# EAGLE board board (EAGLE 5.06)
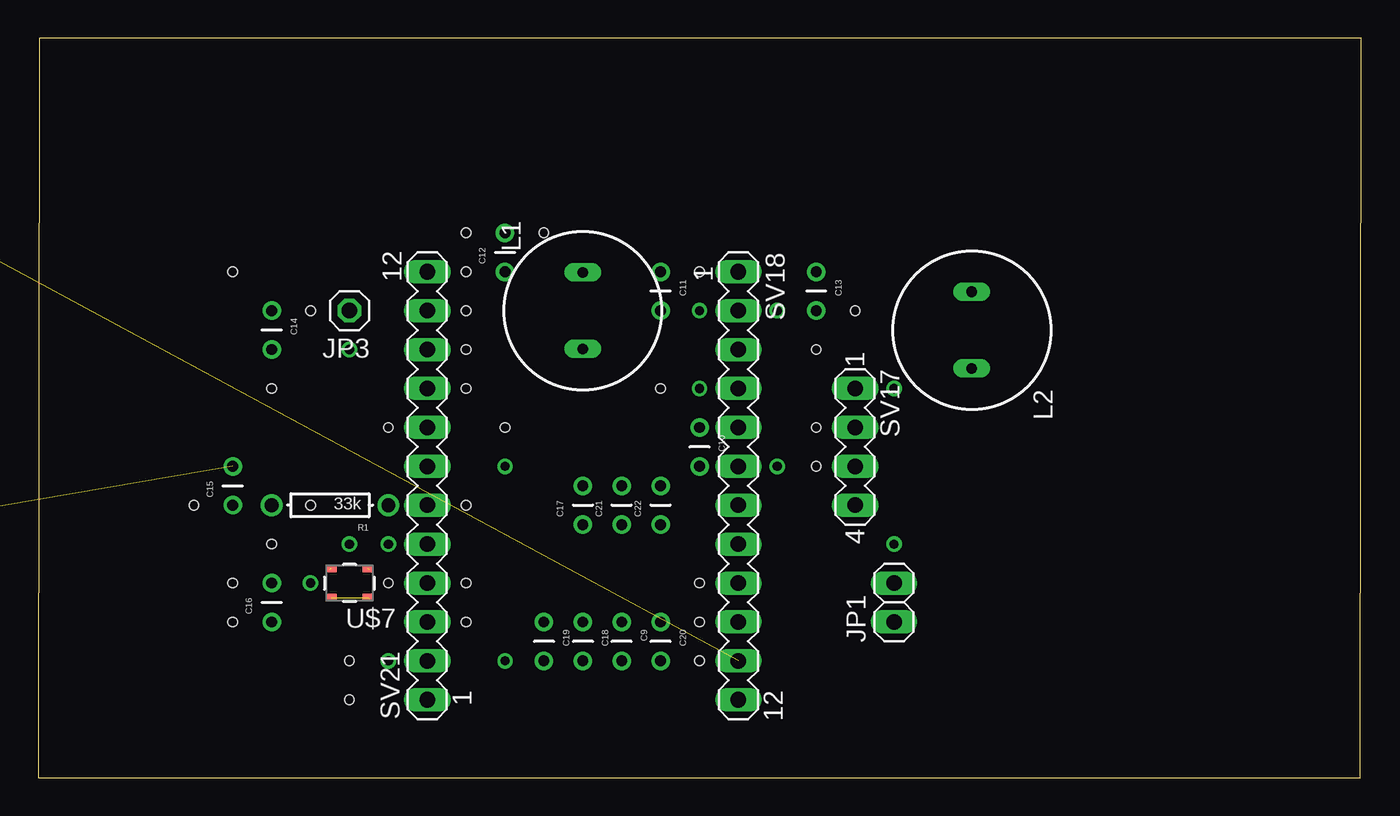
[diagram p0: board, top side]
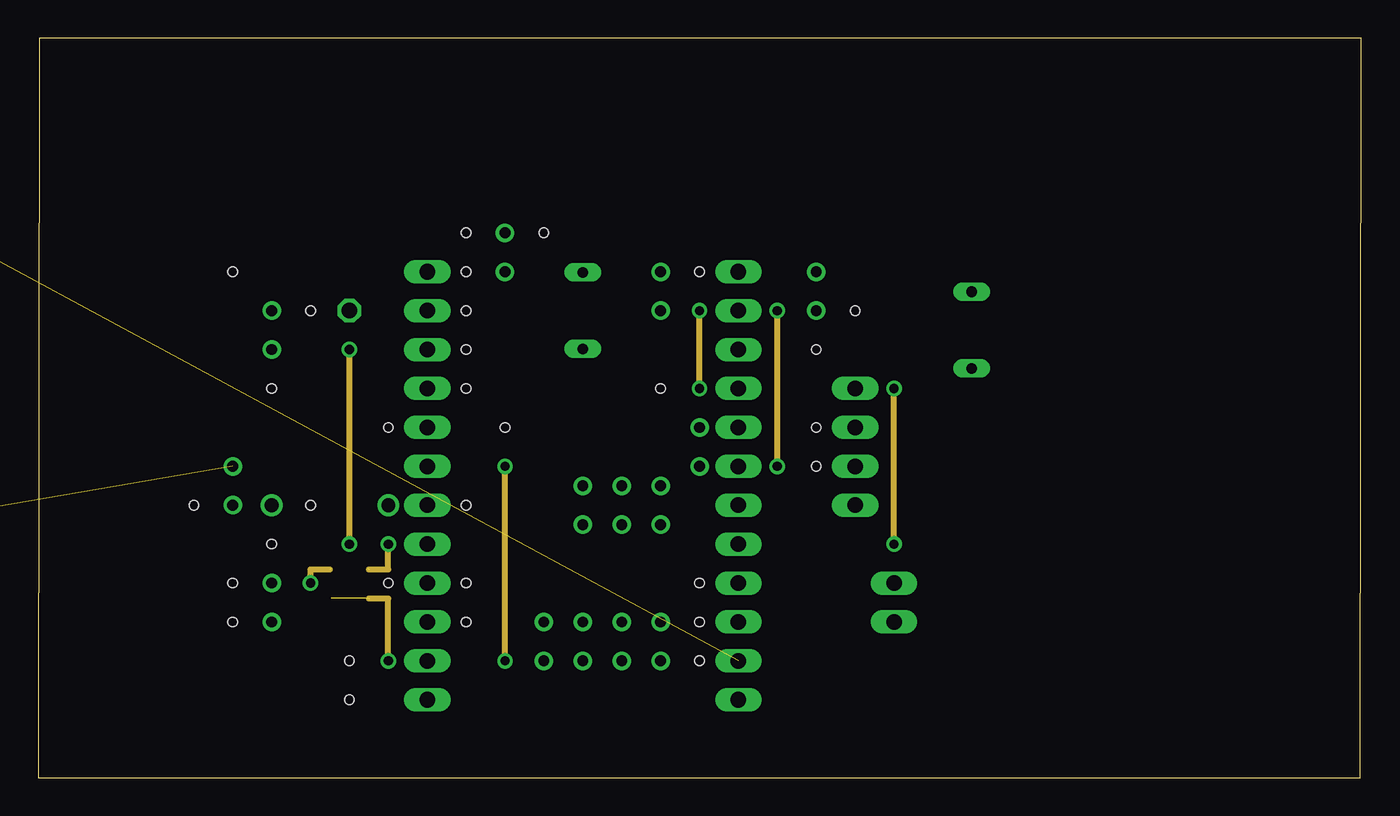
[diagram p1: board, inner layer Route15]
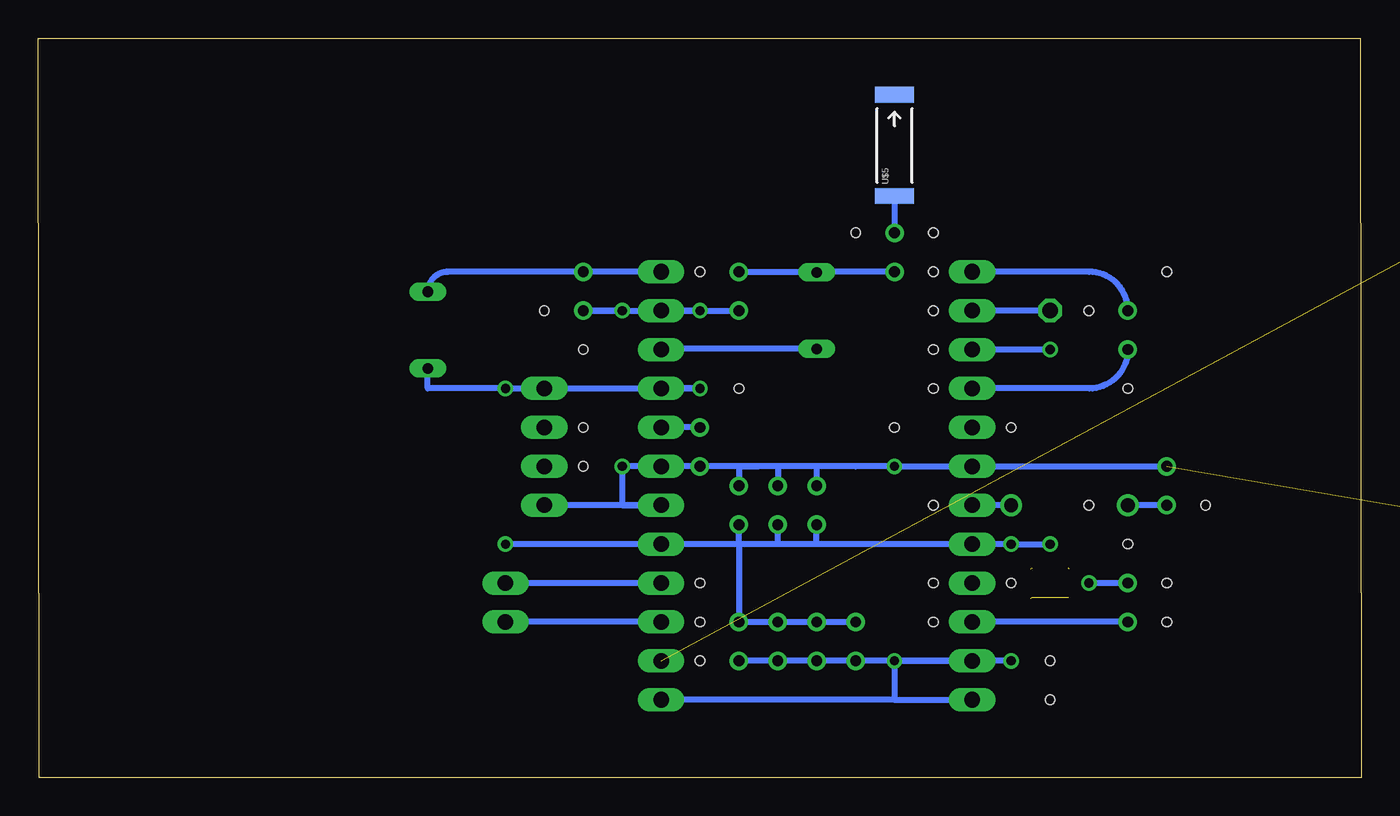
[diagram p2: board, bottom side, seen from below]

Size 86.39 x 48.26 mm. Coordinates in mm from the lower left corner, seen from the top.
Outline: 0,0 86.34,0 86.39,48.26 0.05,48.26 0,0
Copper layers (1*16): Top 0.035mm / dielectric 1.5mm / Bottom 0.035mm
Design rules "default": minimum track width 10mil, minimum drill 24mil, track to track 8mil, track to pad 8mil, pad to pad 8mil, via to via 8mil, smd to smd 8mil, copper to edge 40mil, drill to drill 8mil, minimum pad ring 10mil, minimum via ring 8mil, stop-mask expansion 4mil, vias tented up to drill 0mil, thermal gap 10mil
Holes 0.6 mm at 17.78,30.48 15.24,25.4 27.94,30.48 50.8,22.86 12.7,10.16 12.7,12.7 22.86,12.7 43.18,33.02 53.34,30.48 50.8,27.94 40.64,25.4 22.86,22.86 27.94,33.02 27.94,27.94 27.94,25.4 30.48,22.86 27.94,17.78 27.94,12.7 27.94,10.16 43.18,7.62 43.18,10.16 43.18,12.7 50.8,20.32 20.32,7.62 20.32,5.08 15.24,15.24 10.16,17.78 17.78,17.78 27.94,35.56 33.02,35.56 12.7,33.02

## Footprints (pad centres in the part's own frame; a part is rotated, then mirrored left to right if it is on the bottom)
CAP-PTH-SMALL = drill 0.7 round: 1 0,0; 2 2.54,0
1X02 = drill 1.016 long: 1 -1.27,0; 2 1.27,0
1X01 = drill 1.016 octagon: 1 0,0
BS11 = drill 0.7 long: 1 -2.5,0; 2 2.5,0
AXIAL-0.3 = drill 0.9 round: P$1 -3.81,0; P$2 3.81,0
MA04-1 = drill 1.016 long: 1 -3.81,0; 2 -1.27,0; 3 1.27,0; 4 3.81,0
MA12-1 = drill 1.016 long: 1 -13.97,0; 2 -11.43,0; 3 -8.89,0; 4 -6.35,0; 5 -3.81,0; 6 -1.27,0; 7 1.27,0; 8 3.81,0; 9 6.35,0; 10 8.89,0; 11 11.43,0; 12 13.97,0
SIGE4120 = smd 0.5 x 0.25: AGC_DIS -1.85,-1.25; FILT_BW 1.85,-0.75; FS_SEL1 1.85,-1.25; LNA_IN -1.85,0.25; P$16 1.85,0.25; VAGC -1.85,-0.75; VCC_AGC -1.85,0.75; VCC_LNA -1.85,1.25; VDD_FSE -1.85,-0.25; VDDQ 1.85,0.75; VTUNE 1.85,1.25; XTAL1 1.85,-0.25 | smd 0.25 x 0.5: CLK_OUT -0.25,-1.85; DATA_OUT 0.25,-1.85; FS_SEL0 1.25,-1.85; LNA_OUT -1.25,1.85; MIX_IN 0.25,1.85; OSC_EN 1.25,1.85; P$20 0.75,1.85; RX_EN -0.75,1.85; SYNC 0.75,-1.85; VCC -0.25,1.85; VDDN -0.75,-1.85; VSSN -1.25,-1.85 | smd 2.3 x 2.3: GND 0,0
ANTENNA-CHIP5 = smd 1.016 x 2.54: FEED -3.302,0; NC 3.302,0
TXCO = smd 0.7 x 0.5: P$1_GND -1.2,0.95; P$3_GND 1.2,0.95; P$4_OUTPUT 1.2,-0.95; P$6_VDD -1.2,-0.95

## Placement (x,y rotation side)
C9  10n  [CAP-PTH-SMALL]  38.1,10.16 270 top
C10  10n  [CAP-PTH-SMALL]  43.18,22.86 270 top
C11  1.8p  [CAP-PTH-SMALL]  40.64,33.02 270 top
C12  22p  [CAP-PTH-SMALL]  30.48,33.02 90 top
C13  12p  [CAP-PTH-SMALL]  50.8,33.02 270 top
C14  22p  [CAP-PTH-SMALL]  15.24,30.48 270 top
C15  220p  [CAP-PTH-SMALL]  12.7,17.78 90 top
C16  10n  [CAP-PTH-SMALL]  15.24,10.16 90 top
C17  100n  [CAP-PTH-SMALL]  35.56,16.51 90 top
C18  10n  [CAP-PTH-SMALL]  35.56,10.16 270 top
C19  10n  [CAP-PTH-SMALL]  33.02,10.16 270 top
C20  10n  [CAP-PTH-SMALL]  40.64,10.16 270 top
C21  10n  [CAP-PTH-SMALL]  38.1,16.51 90 top
C22  10n  [CAP-PTH-SMALL]  40.64,16.51 90 top
JP1  GPS<->MUX  [1X02]  55.88,11.43 90 top
JP3  GPS<->MCU  [1X01]  20.32,30.48 180 top
L1  10n  [BS11]  35.56,30.48 90 top
L2  33n  [BS11]  60.96,29.21 270 top
R1  33k  [AXIAL-0.3]  19.05,17.78 180 top
SV17  GPS PWR  [MA04-1]  53.34,21.59 270 top
SV18  GPS-QFN-A  [MA12-1]  45.72,19.05 270 top
SV19  GPS-QFN-B_dontplace  [MA12-1]  -62.23,34.29 0 top  (outside the outline)
SV20  GPS-QFN-A_dontplace  [MA12-1]  -29.21,41.91 0 top  (outside the outline)
SV21  GPS-QFN-B  [MA12-1]  25.4,19.05 90 top
U$3  SIGE4120  [SIGE4120]  -76.2,5.08 0 top  (outside the outline)
U$5  ANTENNA2SMD5  [ANTENNA-CHIP5]  30.48,41.27 90 bottom
U$7  TCXO  [TXCO]  20.32,12.7 180 top

## Library data of the parts
C9-C22 R1 U$5 = SparkFun
JP1 JP3 = pinhead
L1 L2 = inductor-neosid
SV17-SV21 = con-lstb
U$3 U$7 = mylib

## Nets
CLK-MC: SV20.9 U$3.CLK_OUT
GND: C9.2 C10.2 C11.2 C13.2 C15.2 C17.2 C18.2 C19.2 C20.2 C21.2 C22.2 SV17.4 SV18.6 SV18.7 SV18.12 SV21.1 SV21.2 SV21.7 U$3.GND U$7.P$1_GND U$7.P$3_GND
N$5: C10.1 SV18.5
N$7: SV20.3 U$3.LNA_IN
N$8: C11.1 C12.1 L1.2
N$9: C12.2 U$5.FEED
N$10: SV20.1 U$3.VCC_LNA
N$11: SV19.12 U$3.LNA_OUT
N$12: C14.2 SV21.9
N$13: SV19.6 U$3.VTUNE
N$14: C15.1 R1.P$2
N$15: SV19.3 U$3.XTAL1
N$40: C16.2 U$7.P$4_OUTPUT
N$42: L1.1 SV18.3
N$45: C14.1 SV21.12
N$50: C13.1 L2.1 SV18.1
N$51: SV20.2 U$3.VCC_AGC
N$55: SV20.4 U$3.VDD_FSE
N$56: SV20.5 U$3.VAGC
N$57: SV20.6 U$3.AGC_DIS
N$58: SV20.7 U$3.VSSN
N$59: SV20.8 U$3.VDDN
N$60: JP1.2 SV18.9
N$61: JP1.1 SV18.10
N$62: JP3.1 SV21.11
N$63: SV20.12 U$3.FS_SEL0
N$64: SV19.10 U$3.VCC
N$65: SV19.9 U$3.MIX_IN
N$66: SV19.7 U$3.OSC_EN
N$67: SV19.5 U$3.VDDQ
N$68: R1.P$1 SV21.6
N$69: C16.1 SV21.3
N$70: SV19.2 U$3.FILT_BW
N$71: SV19.1 U$3.FS_SEL1
N$74: SV20.10 U$3.DATA_OUT
RX_EN: SV19.11 U$3.RX_EN
SYNC-MC: SV18.11 SV20.11 U$3.SYNC
VCC: C9.1 C17.1 C18.1 C19.1 C20.1 C21.1 C22.1 L2.2 SV17.1 SV18.2 SV18.4 SV18.8 SV21.5 SV21.10 U$7.P$6_VDD

## Tracks (layer width: path | path; a pad name or v marks a point on that pad's centre or on a via)
CLK-MC  (1 unrouted)
GND  (via drill 0.6)  (3 unrouted)
  Route15 0.406: 21.59,11.68 22.86,11.68 v22.86,7.62 | v30.48,7.62 v30.48,20.32 | v48.26,20.32 v48.26,30.48
  Bottom 0.406: v30.48,20.32 SV21.7 v30.48,20.32 | v30.48,20.32 C15.2 | C10.2 SV18.6 C10.2 | 33.02,20.32 35.56,20.32 | 35.56,20.32 38.1,20.32 | 38.1,20.32 40.64,20.32 | 40.64,20.32 C10.2 | 33.02,20.32 35.56,20.32 | 35.56,20.32 38.1,20.32 | 38.1,20.32 39.37,20.32 | 40.64,20.32 39.37,20.32 | 40.64,20.32 v48.26,20.32 48.26,17.78 SV18.7 SV17.4 | v30.48,7.62 SV21.2 | v22.86,7.62 v30.48,7.62 | v22.86,7.62 v30.48,7.62 | v22.86,7.62 v30.48,7.62 | v22.86,7.62 v30.48,7.62 | v22.86,7.62 v30.48,7.62 | v22.86,7.62 v30.48,7.62 | v22.86,7.62 v30.48,7.62 | v22.86,7.62 v30.48,7.62 | 33.02,20.32 35.56,20.32 | 35.56,20.32 38.1,20.32 | 38.1,20.32 40.64,20.32 | 40.64,20.32 C10.2 | 33.02,20.32 35.56,20.32 | 35.56,20.32 38.1,20.32 | 38.1,20.32 39.37,20.32 | 30.48,5.08 SV21.1 | 30.48,5.08 SV18.12 | v30.48,7.62 30.48,5.08 | 30.48,5.08 SV21.1 | 30.48,5.08 SV21.1 | 40.64,20.32 C22.2 | C11.2 C13.2 v48.26,30.48 | v30.48,7.62 C19.2 | C19.2 C18.2 | C18.2 C9.2 | C9.2 C20.2 C9.2 | C19.2 C18.2 | v30.48,20.32 33.02,20.32 | 38.1,20.32 C21.2 | 35.56,20.32 C17.2
N$5
  Bottom 0.406: C10.1 SV18.5
N$7  (1 unrouted)
N$8
  Bottom 0.406: C12.1 35.52,33.02 arc-90 L1.2 40.6,32.98 arc90 C11.1
N$9
  Bottom 0.406: U$5.FEED C12.2
N$10  (1 unrouted)
N$11  (1 unrouted)
N$12
  Bottom 0.406: C14.2 arc90 17.78,25.4 SV21.9
N$13  (1 unrouted)
N$14
  Bottom 0.406: C15.1 R1.P$2
N$15  (1 unrouted)
N$40  (via drill 0.6)  (1 unrouted)
  Route15 0.406: 19.05,13.59 17.78,13.59 v17.78,12.7
  Bottom 0.406: C16.2 v17.78,12.7
N$42
  Bottom 0.406: L1.1 45.68,27.98 arc-90 SV18.3
N$45
  Bottom 0.406: C14.1 arc-90 17.78,33.02 SV21.12
N$50
  Bottom 0.406: SV18.1 C13.1 59.65,33.02 arc-90 L2.1
N$51  (1 unrouted)
N$55  (1 unrouted)
N$56  (1 unrouted)
N$57  (1 unrouted)
N$58  (1 unrouted)
N$59  (1 unrouted)
N$60
  Bottom 0.406: SV18.9 JP1.2
N$61
  Bottom 0.406: SV18.10 JP1.1
N$62
  Bottom 0.406: JP3.1 SV21.11
N$63  (1 unrouted)
N$64  (1 unrouted)
N$65  (1 unrouted)
N$66  (1 unrouted)
N$67  (1 unrouted)
N$68
  Bottom 0.406: R1.P$1 SV21.6
N$69
  Bottom 0.406: C16.1 SV21.3
N$70  (1 unrouted)
N$71  (1 unrouted)
N$74  (1 unrouted)
RX_EN  (1 unrouted)
SYNC-MC  (2 unrouted)
VCC  (via drill 0.6)  (1 unrouted)
  Route15 0.406: v55.88,15.24 v55.88,25.4 | 21.59,13.59 22.86,13.59 v22.86,15.24 | v20.32,15.24 v20.32,27.94 | v43.18,25.4 v43.18,30.48
  Bottom 0.406: SV18.4 v43.18,25.4 SV17.1 v55.88,25.4 60.96,25.4 L2.2 | v22.86,15.24 v20.32,15.24 | v22.86,15.24 SV21.5 | v22.86,15.24 v20.32,15.24 | v22.86,15.24 v20.32,15.24 | v22.86,15.24 v20.32,15.24 | v22.86,15.24 SV21.5 | v22.86,15.24 v20.32,15.24 | v22.86,15.24 v20.32,15.24 | v22.86,15.24 v20.32,15.24 | v22.86,15.24 SV21.5 | v22.86,15.24 v20.32,15.24 | v22.86,15.24 v20.32,15.24 | v22.86,15.24 v20.32,15.24 | v22.86,15.24 SV21.5 | v22.86,15.24 v20.32,15.24 | v22.86,15.24 v20.32,15.24 | v22.86,15.24 v20.32,15.24 | v22.86,15.24 SV21.5 | v22.86,15.24 v20.32,15.24 | v22.86,15.24 v20.32,15.24 | v22.86,15.24 v20.32,15.24 | v22.86,15.24 SV21.5 | v22.86,15.24 v20.32,15.24 | v22.86,15.24 v20.32,15.24 | v22.86,15.24 35.56,15.24 | 35.56,15.24 38.1,15.24 | 38.1,15.24 40.64,15.24 | 40.64,15.24 v55.88,15.24 40.64,15.24 | v22.86,15.24 35.56,15.24 | 35.56,15.24 38.1,15.24 | 38.1,15.24 40.64,15.24 | 40.64,15.24 54.61,15.24 | 40.64,15.24 54.61,15.24 | 40.64,15.24 SV18.8 | v22.86,15.24 35.56,15.24 | 35.56,15.24 38.1,15.24 | 38.1,15.24 40.64,15.24 | v22.86,15.24 v20.32,15.24 | v22.86,15.24 SV21.5 | v20.32,27.94 SV21.10 | 40.64,15.24 54.61,15.24 | 54.61,15.24 55.24,15.24 | 40.64,15.24 C22.1 | v43.18,30.48 SV18.2 | C20.1 C9.1 | C9.1 C18.1 | C18.1 C19.1 | 40.64,15.24 C20.1 | C9.1 C18.1 | C20.1 C9.1 | C20.1 C9.1 | 38.1,15.24 C21.1 | 35.56,15.24 C17.1